# Altium PCB control.PcbDoc
Units mil, origin at the board's own origin, x right, y up, seen from the top; angles counter-clockwise.
Board outline 3935 x 3935 mil, 2 copper layers (Top Layer, Bottom Layer); 84 components, 50 nets, 326 pads, 61 vias.
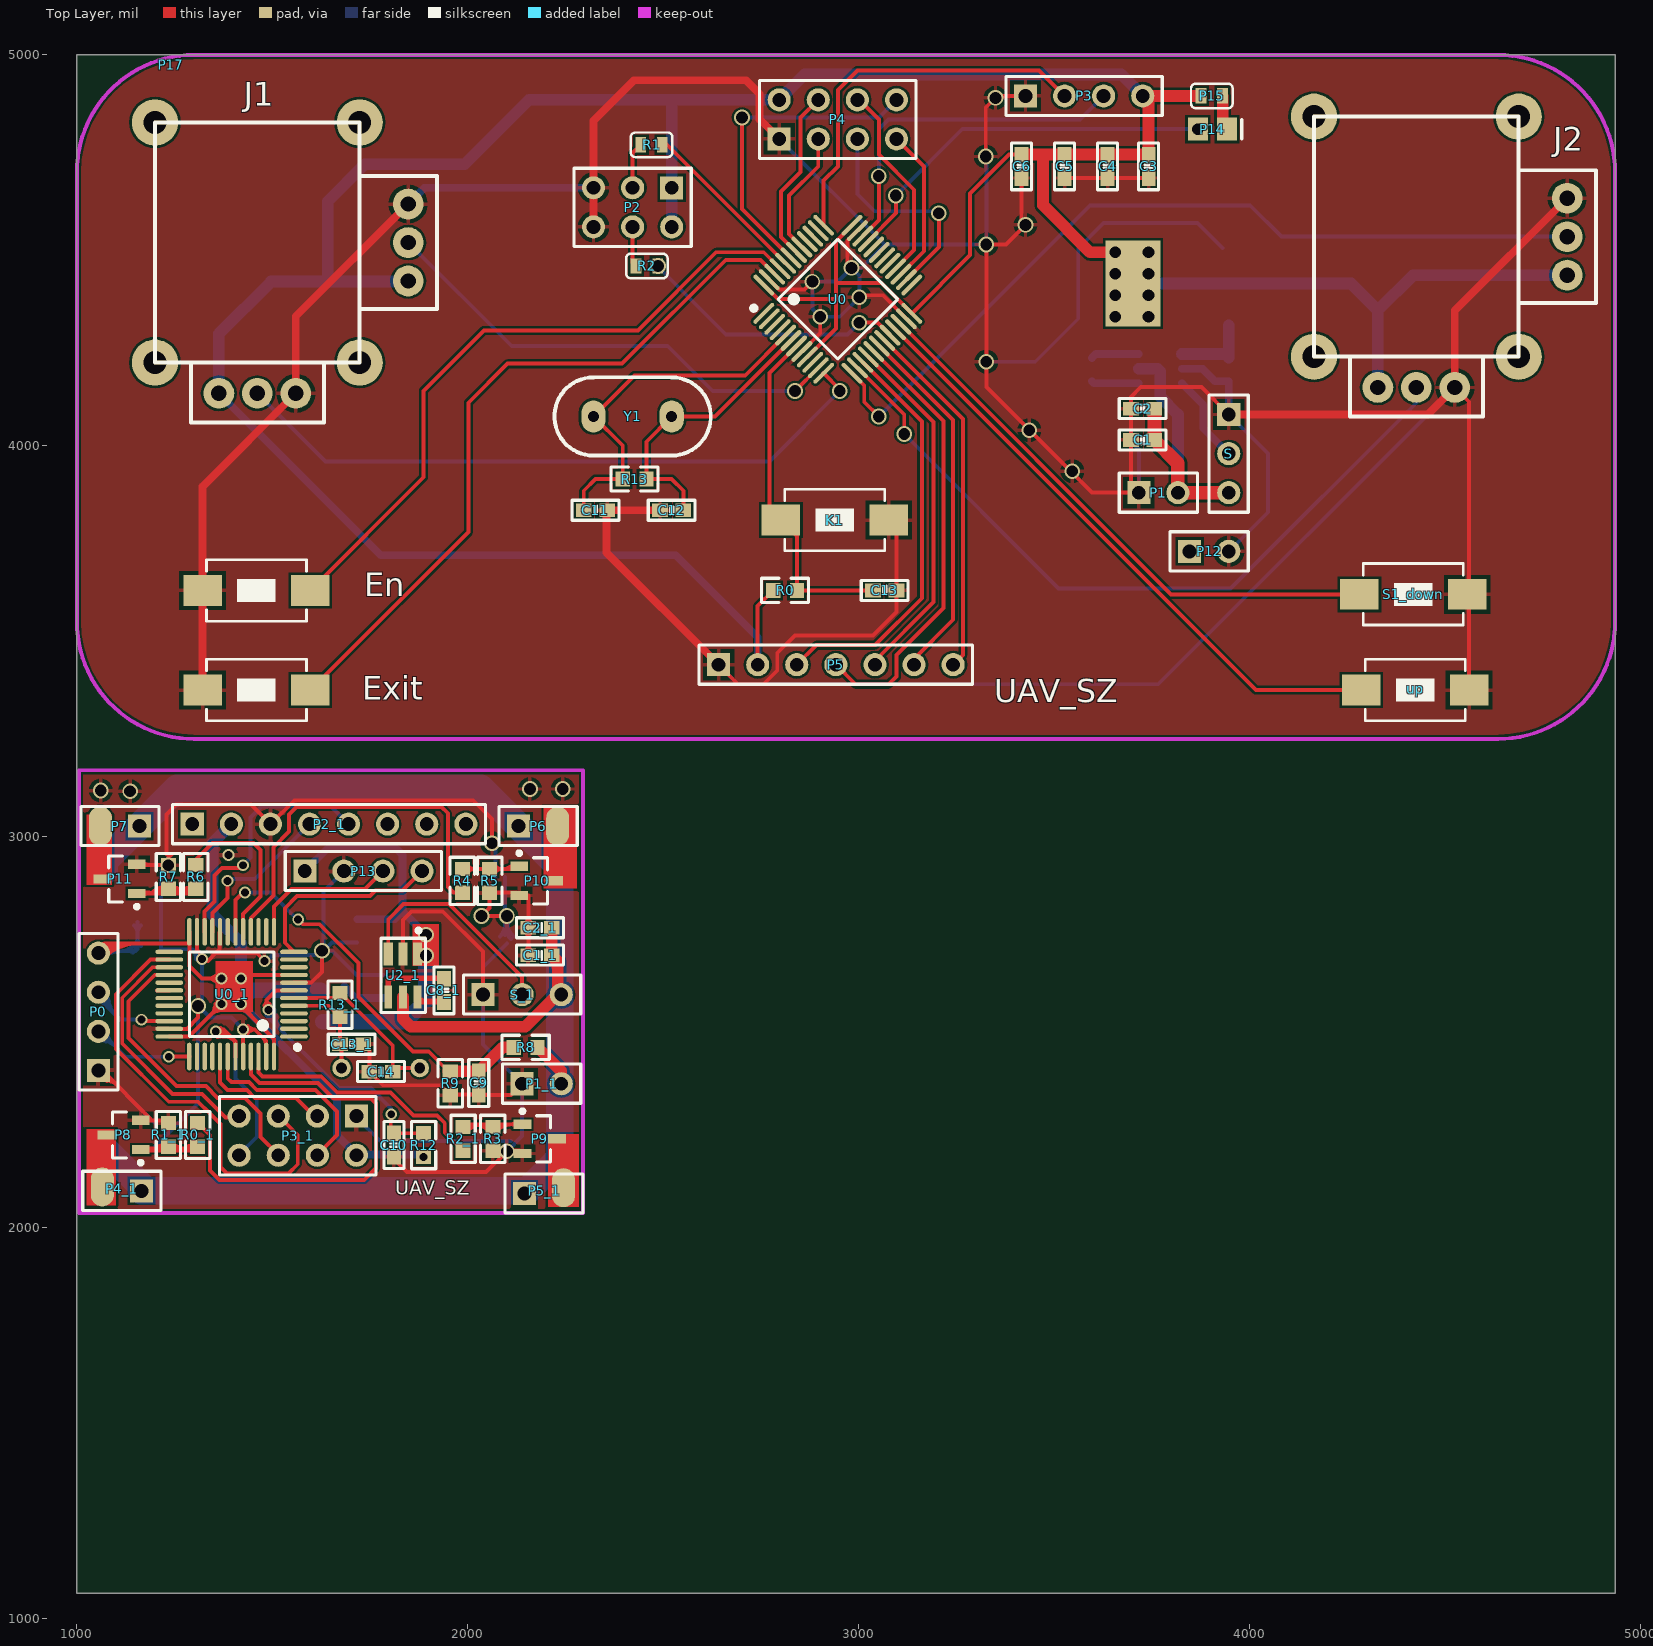
[diagram p0: Top Layer view]
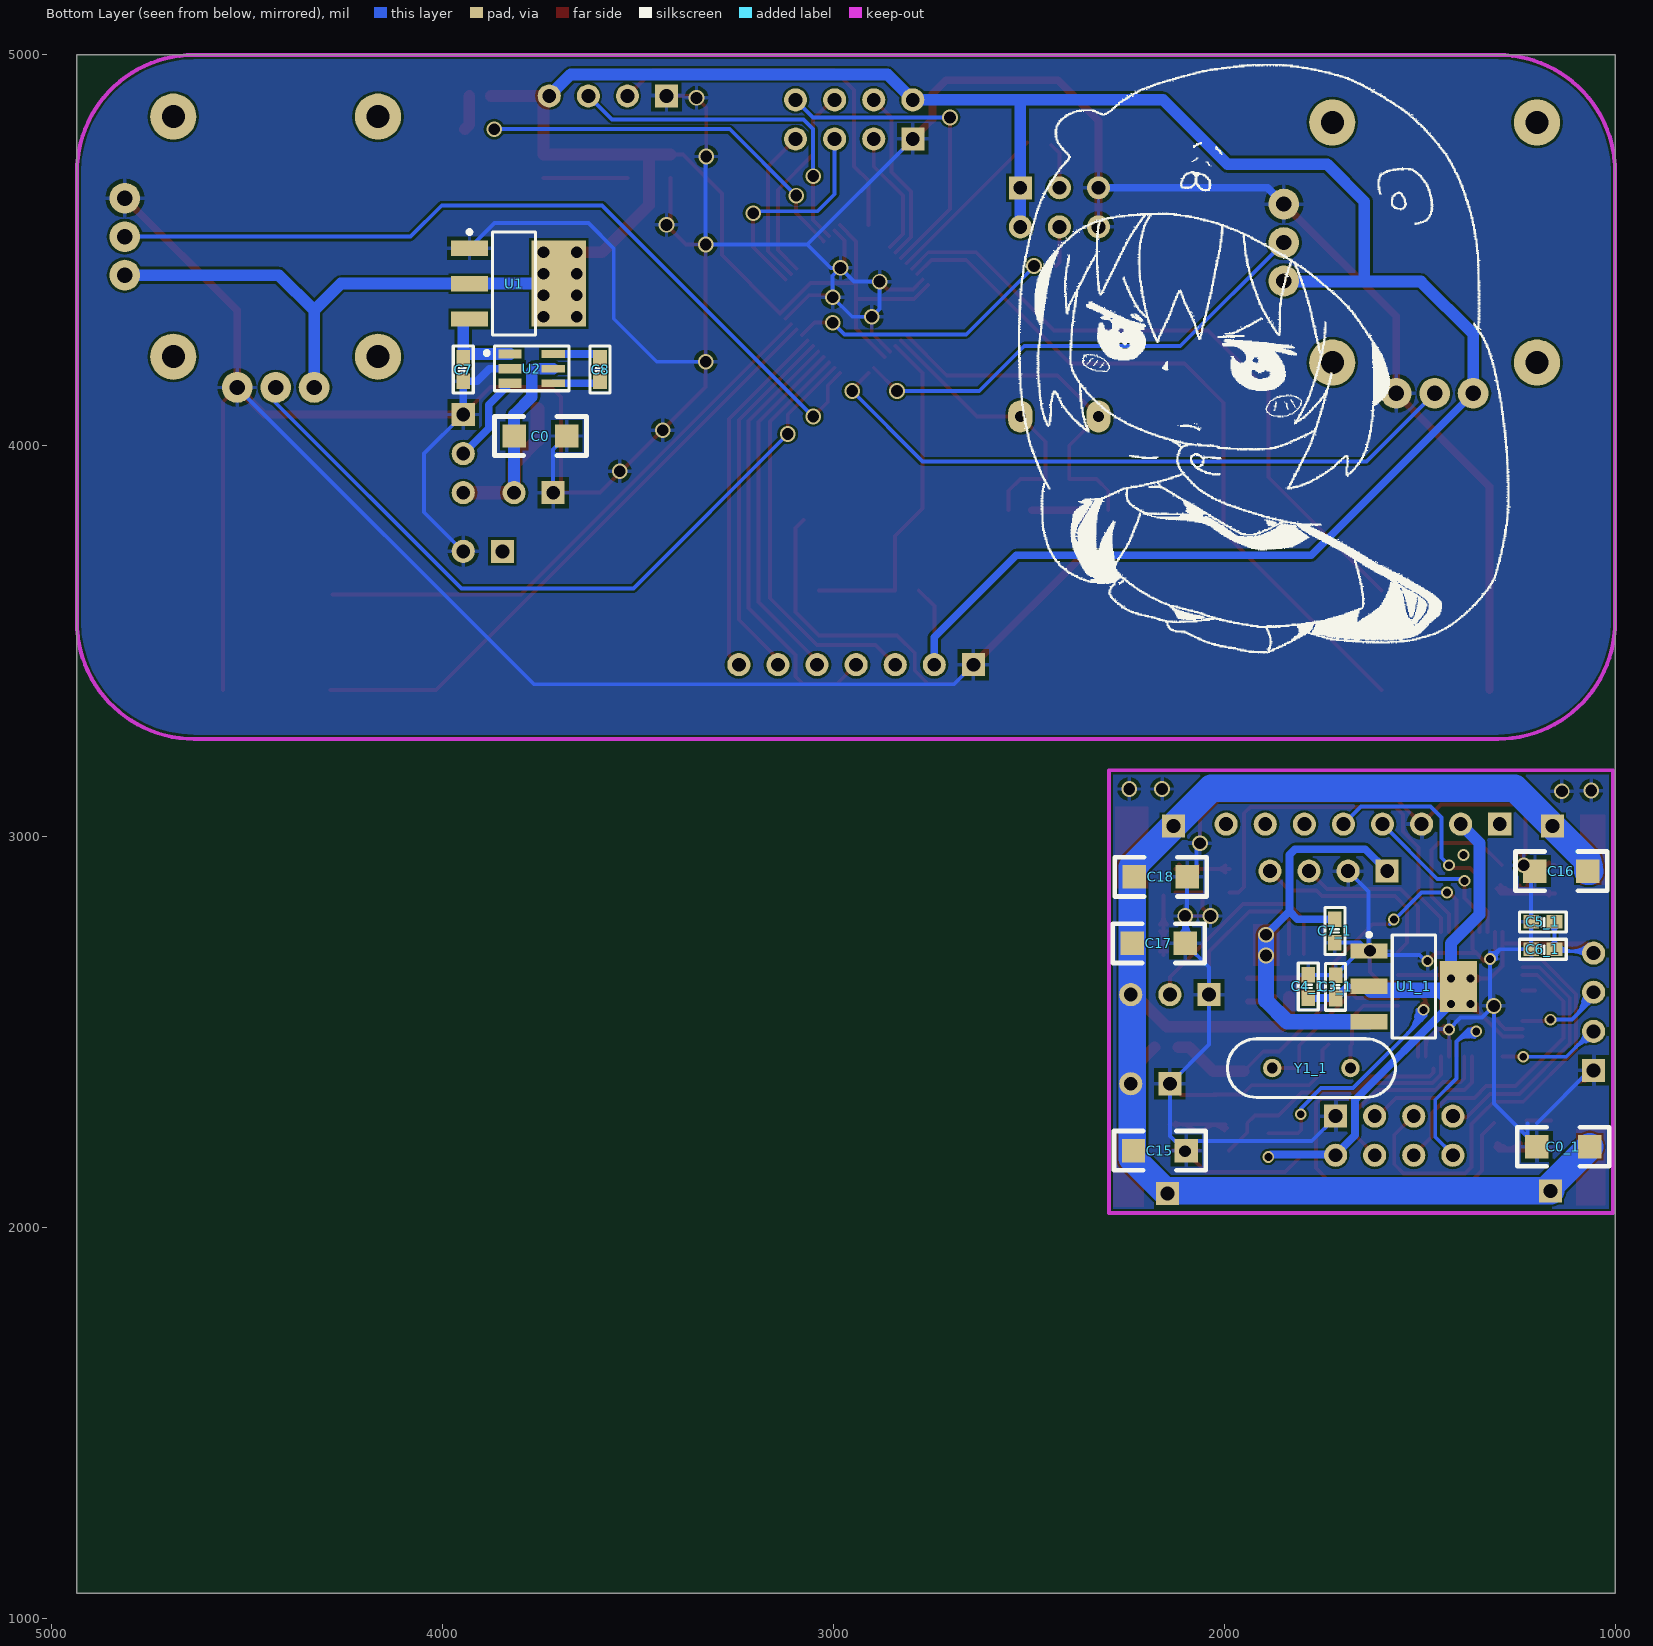
[diagram p1: Bottom Layer view, seen from below]

## Layer stack, top to bottom
Top Solder: solder mask 0.4, Solder Resist, Dk 3.5
Top Layer: signal copper 1.4
Dielectric 1: dielectric 12.6, FR-4, Dk 4.8
Bottom Layer: signal copper 1.4
Bottom Solder: solder mask 0.4, Solder Resist, Dk 3.5

## Board outline
1000,1065 1000,5000 4935,5000 4935,1065

## Design rules (kind name [scope] priority, off if disabled: settings)
Clearance [All] p1: gap=6
HoleToHoleClearance [All] p1: gap=0 allowstackedmicrovias=TRUE
MinimumSolderMaskSliver [All] p1: minsoldermaskwidth=0
PolygonConnect [All] p1: connectstyle=Relief reliefconductorwidth=10 reliefentries=4 polygonreliefangle="90 Angle" airgapwidth=10
RoutingVias [All] p1: holewidth=28 width=50 viastyle="Through Hole" minholewidth=28 minwidth=50 maxholewidth=28 maxwidth=50
ShortCircuit [All] p1: allowed=TRUE
SilkToBoardRegionClearance [All] p1 off:
SilkToSilkClearance [All] p1: silktosilkclearance=0
SilkToSolderMaskClearance [IsPad] p1: minsilkscreentomaskgap=0 clearancetoexposedcopper=TRUE
SolderMaskExpansion [All] p1: expansion=4
Width [All] p1: maxlimit=100 minlimit=10 preferedwidth=10
23 further rules are at their usual default settings.

## Classes and differential pairs
component class control: C0 C1 C2 C3 C4 C5 C6 C7 C8 C11 C12 C13 En exit J1 J2 K1 P1 P2 P3 P4 P5 R0 R1 R2 R13 S1_down U1 U2 up

## Components (designator, comment, footprint, x,y, rotation, side; value= is the part's Value field where it differs from the comment)
C0 "Cap Pol" 1206C 3751.62,4025 r180 bottom
C0_1 "Cap Pol" 1206C 1130,2207 r0 bottom (schematic designator C0)
C1 "104" C0603 3726.62,4015 r0 top
C1_1 "104" C0603 2185,2697 r0 top (schematic designator C1)
C2 "Cap" C0603 3726.62,4095 r180 top
C2_1 "Cap" C0603 2185,2767 r180 top (schematic designator C2)
C3 "Cap" C0603 3741.62,4715 r90 top
C3_1 "Cap" C0603 1715,2616 r270 bottom (schematic designator C3)
C4 "Cap" C0603 3636.62,4715 r90 top
C4_1 "Cap" C0603 1785,2617 r270 bottom (schematic designator C4)
C5 "Cap" C0603 3526.62,4715 r90 top
C5_1 "Cap" C0603 1185,2782 r180 bottom (schematic designator C5)
C6 "Cap" C0603 3416.62,4715 r90 top
C6_1 "Cap" C0603 1185,2712 r180 bottom (schematic designator C6)
C7 "Cap" C0603 3946.62,4195 r270 bottom
C7_1 "Cap" C0603 1717,2759 r270 bottom (schematic designator C7)
C8 "Cap" C0603 3596.62,4195 r270 bottom
C8_1 "Cap" C0603 1939,2607 r90 top (schematic designator C8)
C9 "Cap" C0603 2028,2370 r90 top
C10 "Cap" C0603 1811,2211 r90 top
C11 "20p" C0603 2326.62,3835 r180 top
C12 "20p" C0603 2521.62,3835 r0 top
C13 "Cap" C0603 3066.62,3630 r180 top
C13_1 "20p" C0603 1703,2469 r180 top (schematic designator C13)
C14 "20p" C0603 1778,2399 r0 top
C15 "Cap Pol" 1206C 2167,2197 r180 bottom
C16 "Cap Pol" 1206C 1135,2912 r0 bottom
C17 "Cap Pol" 1206C 2170,2727 r180 bottom
C18 "Cap Pol" 1206C 2165,2897 r180 bottom
En "SW-PB" SW_PB2_A1 1461.62,3630 r90 top (schematic designator S2_enter)
Exit "SW-PB" SW_PB2_A1 1461.62,3375 r90 top (schematic designator S3_exit)
J1 "JoyStick" JoyStick 1461.62,4520 r270 top
J2 "JoyStick" JoyStick 4426.62,4535 r270 top
K1 "re" SW_PB2_A1 2936.62,3810 r270 top
P0 "Header 4" HDR1X4 1055,2402 r90 top
P1 "POWER" HDR1X2#1 3716.62,3880 r0 top
P1_1 "POWER" HDR1X2#1 2139,2368 r0 top (schematic designator P1)
P2 "Header 3X2" HDR2X3 2521.62,4660 r180 top
P2_1 "GY-86" HDR1X8 1295,3032 r0 top (schematic designator P2)
P3 "Header 4" HDR1X4 3426.62,4895 r0 top
P3_1 "NRF24L01" HDR2X4 1715,2285 r180 top (schematic designator P3)
P4 "NRF24L01" HDR2X4 2796.62,4785 r0 top
P4_1 "Header 2" HDR1X2#2 1165,2094 r180 top (schematic designator P4)
P5 "Header 7" HDR1X7 2641.62,3440 r0 top
P5_1 "Header 2" HDR1X2#3 2145,2087 r0 top (schematic designator P5)
P6 "Header 2" HDR1X2#4 2130,3027 r0 top
P7 "Header 2" HDR1X2#4 1160,3027 r180 top
P8 "SI2302" SOT-23B_N 1119,2237 r180 top
P9 "SI2302" SOT-23B_N 2184,2227 r0 top
P10 "SI2302" SOT-23B_N 2176,2887 r0 top
P11 "SI2302" SOT-23B_N 1109,2892 r180 top
P12 "Comment" HDR1X2#1 3846.62,3730 r0 top
P13 "Comment" HDR1X4 1583,2912 r0 top
P14 "Comment" LED_0805 3905,4810 r0 top
P15 "Comment" 0603R 3905,4895 r180 top
P17 "Comment" xiaomai 1240,4975 r0 top
R0 "Res" 0603_R 2811.62,3630 r180 top
R0_1 "1k" 0603_R 1309,2237 r270 top (schematic designator R0)
R1 "100K" 0603R 2471.62,4770 r180 top
R1_1 "10K" 0603_R 1234,2237 r270 top (schematic designator R1)
R2 "100K" 0603R 2456.62,4460 r0 top
R2_1 "Res1" 0603_R 1988,2227 r90 top (schematic designator R2)
R3 "Res1" 0603_R 2064,2227 r90 top
R4 "Res1" 0603_R 1986,2887 r270 top
R5 "Res1" 0603_R 2056,2887 r90 top
R6 "Res1" 0603_R 1304,2897 r90 top
R7 "Res1" 0603_R 1234,2897 r270 top
R8 "Res1" 0603_R 2148,2461 r0 top
R9 "Res1" 0603_R 1955,2369 r90 top
R12 "Res" 0603_R 1887,2211 r270 top
R13 "Res2" 0603_R 2426.62,3915 r180 top
R13_1 "Res2" 0603_R 1673,2570 r270 top (schematic designator R13)
S "HEADER 3" HDR1X3 3946.62,4080 r270 top
S1_down "SW-PB" SW_PB2_A1 4416.62,3620 r270 top
S_1 "HEADER 3" HDR1X3 2039,2596 r0 top (schematic designator S)
U0 "Component_1" LQFP-48_7x7x05P 2946.62,4375 r315 top
U0_1 "Component_1" LQFP-48_7x7x05P 1395.83,2597 r90 top (schematic designator U0)
U1 "AMS1117" SOT223_N#1 3816.62,4415 r180 bottom
U1_1 "AMS1117" SOT223_N#2 1515,2617 r180 bottom (schematic designator U1)
U2 "LTC3200" SOT-23-6 3771.62,4197.22 r270 bottom
U2_1 "LTC3200" SOT-23-6 1834,2645 r180 top (schematic designator U2)
up "SW-PB" SW_PB2_A1 4421.62,3375 r270 top (schematic designator S0_up)
Y1 "8M" XTAL-RAD-0.2#1 2421.62,4075 r180 top
Y1_1 "8M" XTAL-RAD-0.2#2 1777,2408 r180 bottom (schematic designator Y1)

## Footprints (in the part's own frame and the unit in brackets; to place one, negate y for a bottom-side part, rotate by r counter-clockwise, add the part's x,y. Pads: shape width x height; smd on the part's side, far side on the other; paste and mask are expansions set on the pad)
0603_R [mm]
  rect 0.93x0.98 smd: 1(-0.77,0) 2(0.77,0)
  silkscreen extent -1.53,-0.79 1.54,0.79, body extent -0.85,-0.4 0.85,0.4, height 0.56
0603R [mm]
  rect 0.7x1 smd: 1(-0.66,0) 2(0.74,0)
  silkscreen extent -1.31,-0.8 1.39,0.8, body extent -0.76,-0.4 0.84,0.4, height 0.3
1206C [mil]
  rect 60x60 smd: 1(-65,0) 2(70,0)
  silkscreen extent -115,-50 120,50, body extent -63,-31 63,31, height 39
C0603 [mil]
  rect 40x35 smd: 1(-29.92,0)
  rect 40x35 smd mask+4: 2(29.92,0)
  silkscreen extent -60,-26 60,26
HDR1X2#1 [mm] "Connector; Header; 2 Position"
  rect 1.5x1.5 hole 0.9: 1(0,0)
  round 1.5 hole 0.9: 2(2.54,0)
  silkscreen extent -1.27,-1.27 3.81,1.27
HDR1X2#2 [mm] "Connector; Header; 2 Position"
  rect 1.5x1.5 hole 0.9: 1(0,0)
  oval 1.5x2.54 smd: 2(2.54,-0.254)
  silkscreen extent -1.27,-1.27 3.81,1.27
HDR1X2#3 [mm] "Connector; Header; 2 Position"
  rect 1.5x1.5 hole 0.9: 1(0,0)
  oval 1.5x2.54 smd: 2(2.54,0.381)
  silkscreen extent -1.27,-1.27 3.81,1.27
HDR1X2#4 [mm] "Connector; Header; 2 Position"
  rect 1.5x1.5 hole 0.9: 1(0,0)
  oval 1.5x2.54 smd: 2(2.54,0)
  silkscreen extent -1.27,-1.27 3.81,1.27
HDR1X3 [mm] "Connector; Header; 3 Position"
  rect 1.5x1.5 hole 0.9: 1(0,0)
  round 1.5 hole 0.9: 2(2.54,0) 3(5.08,0)
  silkscreen extent -1.27,-1.27 6.35,1.27
HDR1X4 [mm]
  rect 1.5x1.5 hole 0.9: 1(0,0)
  round 1.5 hole 0.9: 2(2.54,0) 3(5.08,0) 4(7.62,0)
  silkscreen extent -1.27,-1.27 8.89,1.27
HDR1X7 [mm] "Connector; Header; 7 Position"
  rect 1.5x1.5 hole 0.9: 1(0,0)
  round 1.5 hole 0.9: 2(2.54,0) 3(5.08,0) 4(7.62,0) 5(10.16,0) 6(12.7,0) 7(15.24,0)
  silkscreen extent -1.27,-1.27 16.51,1.27
HDR1X8 [mm] "Connector; Header; 8 Position"
  rect 1.5x1.5 hole 0.9: 1(0,0)
  round 1.5 hole 0.9: 2(2.54,0) 3(5.08,0) 4(7.62,0) 5(10.16,0) 6(12.7,0) 7(15.24,0) 8(17.78,0)
  silkscreen extent -1.27,-1.27 19.05,1.27
HDR2X3 [mm] "Connector; Header; 3x2 Position"
  rect 1.5x1.5 hole 0.9: 1(0,0)
  round 1.5 hole 0.9: 2(0,2.54) 3(2.54,0) 4(2.54,2.54) 5(5.08,0) 6(5.08,2.54)
  silkscreen extent -1.27,-1.27 6.35,3.81
HDR2X4 [mm] "Connector; Header; 4x2 Position"
  rect 1.5x1.5 hole 0.9: 1(0,0)
  round 1.5 hole 0.9: 2(0,2.54) 3(2.54,0) 4(2.54,2.54) 5(5.08,0) 6(5.08,2.54) 7(7.62,0) 8(7.62,2.54)
  silkscreen extent -1.27,-1.27 8.89,3.81
JoyStick [mm] "ģ?"
  round 2 hole 1: 1(-2.5,9.8) 2(0,9.8) 3(2.5,9.8) 4(9.8,2.5) 5(9.8,0) 6(9.8,-2.5)
  round 3 hole 1.5: 11(-7.8,6.65) 12(7.8,6.65) 13(-7.8,-6.65) 14(7.8,-6.65)
  silkscreen extent -7.8,-6.65 11.68,11.68
LED_0805 [mm] "贴片二极管"
  rect 1.3x1.5 smd: 1(-0.95,0) 2(0.95,0)
  silkscreen extent 1.91,-0.64 1.91,0.64
LQFP-48_7x7x05P [mm]
  oval 0.28x1.8 smd mask+0.051: 1(-2.75,-4.05) 2(-2.25,-4.05) 3(-1.75,-4.05) 4(-1.25,-4.05) 5(-0.75,-4.05) 6(-0.25,-4.05) 7(0.25,-4.05) 8(0.75,-4.05) 9(1.25,-4.05) 10(1.75,-4.05) 11(2.25,-4.05) 12(2.75,-4.05) 25(2.75,4.05) 26(2.25,4.05) 27(1.75,4.05) 28(1.25,4.05) 29(0.75,4.05) 30(0.25,4.05) 31(-0.25,4.05) 32(-0.75,4.05) 33(-1.25,4.05) 34(-1.75,4.05) 35(-2.25,4.05) 36(-2.75,4.05)
  oval 1.8x0.28 smd mask+0.051: 13(4.05,-2.75) 14(4.05,-2.25) 15(4.05,-1.75) 16(4.05,-1.25) 17(4.05,-0.75) 18(4.05,-0.25) 19(4.05,0.25) 20(4.05,0.75) 21(4.05,1.25) 22(4.05,1.75) 23(4.05,2.25) 24(4.05,2.75) 37(-4.05,2.75) 38(-4.05,2.25) 39(-4.05,1.75) 40(-4.05,1.25) 41(-4.05,0.75) 42(-4.05,0.25) 43(-4.05,-0.25) 44(-4.05,-0.75) 45(-4.05,-1.25) 46(-4.05,-1.75) 47(-4.05,-2.25) 48(-4.05,-2.75)
  silkscreen extent -3.6,-4.42 2.75,2.75
SOT223_N#1 [mm] "SOT223, 4-Leads, Body 6.5x3.5mm, Pitch 2.3mm, Lead Span 7mm, IPC Medium Density"
  rect 2.4x1 smd: 1(-2.9,2.3) 2(-2.9,0) 3(-2.9,-2.3)
  rect 3.556x5.588 smd: 4(2.9,0)
  silkscreen extent -3.03,-3.35 1.4,3.47, body extent -1.85,-3.35 1.85,3.35, height 1.7
SOT223_N#2 [mm] "SOT223, 4-Leads, Body 6.5x3.5mm, Pitch 2.3mm, Lead Span 7mm, IPC Medium Density"
  rect 2.4x1 smd: 1(-2.9,2.3) 2(-2.9,0) 3(-2.9,-2.3)
  rect 2.4x3.3 smd: 4(2.9,0)
  silkscreen extent -3.03,-3.35 1.4,3.47, body extent -1.85,-3.35 1.85,3.35, height 1.7
SOT-23-6 [mm]
  rect 0.6x1.5 smd: 1(-0.95,-1.4) 2(0,-1.4)
  rect 0.63x1.5 smd: 3(0.95,-1.4)
  rect 0.5x1.5 smd: 4(0.95,1.4) 5(0,1.4) 6(-0.95,1.4)
  silkscreen extent -1.47,-3.05 1.43,2.41
SOT-23B_N [mm] "SOT23, 3-Leads, Body 2.9x1.3mm, Pitch 0.95mm, Lead Span 2.4mm, IPC Medium Density"
  rect 1.15x0.6 smd: 1(-1.125,0.95) 2(-1.125,-0.95) 3(1.125,0)
  silkscreen extent -1.25,-1.5 0.7,1.92, body extent -0.7,-1.5 0.7,1.5, height 1.14
SW_PB2_A1 [mm]
  rect 2x2.5 smd: 1(0,3.556) 2(0,-3.444)
  silkscreen extent -2,-3.19 2,3.31, body extent -2.03,-3.17 2.03,3.3, height 1.2
xiaomai [mil]
XTAL-RAD-0.2#1 [mil] "Radial Cap, Thru-Hole; 2 Leads; 0.2 in Pin Spacing"
  oval 62x82 hole 28: 1(-100,0) 2(100,0)
  silkscreen extent -200,-100 200,100
XTAL-RAD-0.2#2 [mil] "Radial Cap, Thru-Hole; 2 Leads; 0.2 in Pin Spacing"
  round 47.24 hole 27.56: 1(-100,0) 2(100,0)
  silkscreen extent -215,-75 215,75, body extent -210,-81 210,81, height 127

## Part data
C0 C0_1 C15 C16 C17 C18: "极性电解电容"
C1 C1_1 C11 C12 C13_1 C14: library part CAP, "Capacitor"
C2 C2_1 C10 C13: "贴片电容"
C3 C3_1 C4 C4_1 C5 C5_1 C6 C6_1 C7 C7_1 C9: "无极性电容"
C8 C8_1: "Capacitor"
En Exit S1_down up: "微动开关"
J1 J2: "模拟摇杆"
K1: library part key
P0 P3: "Header, 4-Pin"
P1 P1_1: library part "Header 2", "Header, 2-Pin"
P2: "Header, 3-Pin, Dual row"
P2_1: library part "Header 8", "Header, 8-Pin"
P3_1 P4: library part "Header 4X2", "Header, 4-Pin, Dual row"
P4_1 P5_1 P6 P7: "Header, 2-Pin"
P5: "Header, 7-Pin"
R0 R2_1 R3 R4 R5 R6 R7 R8 R9 R12: "贴片电阻"
R0_1 R1_1: library part Res1, "贴片电阻"
R1 R2: library part Res, "贴片电阻"
R13 R13_1: "Resistor"
Y1 Y1_1: library part XTAL

## Free pads (board coordinates)
  rect 140x220 smd: 0(3701.62,4415)

## Via types
v1: diameter 40, hole 30, Top Layer to Bottom Layer, 43 vias
v2: diameter 30, hole 20, Top Layer to Bottom Layer, 18 vias

## Nets (pads, with @x,y where several pads share a name; then routed paths per layer and width w, separated by ;. In a path a pad name is that pad's centre, name@x,y a point inside that pad or via, vN(x,y) a via of type N, cw(c..) or ccw(c..) an arc to the next point about the centre after c; other vN are vias at no path point)
3V3: C3.2 C4.2 C5.2 C6.2 J1.3 J1.6 J2.3 J2.6 P2.1 P2.2 P3.4 P4.2 P5.2 P15.2 pad.0 R0.2 U0.9 U0.24 U0.36 U0.48 U1.2 U1.4 | length 9103.4
  Top Layer w10: P5.2 2741.62,3590.32 R0.2 ; U0.48 2793.51,4375 2941.62,4375 ; U0.9 2941.62,4300.4 2941.62,4416.89 ; U0.36 2941.62,4523.11 2941.62,4416.89 ; C6.2 3384.92,4744.92 3285,4645 3285,4487.88 U0.24 3057.85,4416.89 2941.62,4416.89 ; pad.0@3647.81,4338.81 v1(3656.62,4330)
  Top Layer w30: C6.2 3471.62,4744.92 3471.62,4615 3591.62,4495 v1(3656.62,4495) ; 3476.62,4744.92 C5.2 C4.2 C3.2 3741.62,4880 P3.4 P15.2
  Bottom Layer w20: J1.6 1777.37,3720 2531.62,3720 2741.62,3510 P5.2
  Bottom Layer w30: J1.6 1363.2,4286.57 1496.62,4420 1845.87,4420 J1.3 ; 1641.62,4420 1641.62,4625 1736.62,4720 1991.62,4720 2156.62,4885 P4.2 2861.62,4950 3671.62,4950 P3.4 ; P2.2 P2.1 2521.62,4883.38 ; U1.4 U1.2 4259.77,4415 4328.2,4346.57 ; J2.6 4328.2,4346.57 ; J2.3 4418.2,4436.57 4328.2,4346.57
  other v1: 3741.62,4330 3656.62,4385 3741.62,4385 3656.62,4440 3741.62,4440 3741.62,4495
5V: C7.1 U1.3 U2.1 | length 193.9
  Bottom Layer w30: U2.1 C7.1@3936.92,4234.63 ; C7.1 U1.3@3946.62,4308.62
BOOT0: R1.1 U0.44 | length 437.3
  Top Layer w10: R1.1@2503.74,4776.12 U0.44
BOOT1: R2.2 U0.20 | length 692.2
  Top Layer w10: v1(3001.62,4315) 3048.38,4315 U0.20
  Bottom Layer w10: v1@2485.81,4459.19 2660,4285 2971.62,4285 v1(3001.62,4315)
  other v1: 2486.62,4460
GND: C0.2 C1.1 C2.2 C3.1 C4.1 C5.1 C6.1 C7.2 C11.1 C12.1 C13.1 En.1 Exit.1 J1.1 J1.4 J2.1 J2.4 K1.1 P1.1 P2.5 P2.6 P3.1 P4.1 P5.1 P12.2 S1_down.1 S.1 U0.8 U0.23 U0.35 U0.47 U1.1 U2.2 up.1 | length 14218
  Top Layer w10: P5.1 2691.62,3390 2756.62,3390 2791.62,3425 2791.62,3470 2836.62,3515 3036.62,3515 3096.54,3574.92 C13.1 3096.54,3790.08 K1.1 ; U0.47 2796.35,4400 2861.62,4400 v1(2881.62,4420) ; U0.8 2901.62,4288.24 v1(2901.62,4330) ; v1@2971.62,4455 2971.62,4525.27 U0.35 ; v1@3001.62,4385 3061.9,4385 U0.23 ; v1(3325,4740) 3325,4865 v1(3350,4890) ; v1@3355,4895 P3.1 ; v1@3416.62,4575 C6.1 ; v1(3426.62,4565) 3376.62,4515 v1(3326.62,4515) v1(3326.62,4215) 3326.62,4150 3596.62,3880 P1.1 P1.1@3696.7,3899.92 ; C5.1 C4.1 C3.1 ; P1.1@3696.7,3880 C1.1 C2.2 3696.7,4125.08 3721.62,4150 3876.62,4150 S.1 ; J2.4 4561.62,4112.6 up.1
  Top Layer w20: Exit.1 En.1 1321.62,3895.75 J1.4 1560.05,4331.02 J1.1 ; P2.6 P2.5 2321.62,4831.62 2425,4935 2711.62,4935 2746.62,4900 2746.62,4835 P4.1 ; C11.1@2355,3835 2355,3726.62 P5.1 ; C11.1 C12.1 ; S.1 4455.87,4080 J2.4 4525.05,4346.02 J2.1
  Bottom Layer w10: P5.1 2691.62,3390 3765.87,3390 J2.4 ; P4.1 3066.62,4515 ; v1(3325,4740) 3325,4741.62 3326.62,4740 v1(3326.62,4515) 3066.62,4515 ; v1(3326.62,4215) 3451.62,4215 3561.62,4325 3561.62,4505 3626.62,4570 3866.35,4570 U1.1 ; C0.2 3716.62,3990 P1.1 ; P12.2 4046.62,3830 4046.62,3980 S.1 ; v1(2981.62,4455) 3006.62,4455 3066.62,4515 ; v1(2981.62,4455) 3001.62,4435 v1(3001.62,4380) 2951.62,4330 v1(2901.62,4330) 2881.62,4350 v1(2881.62,4420) 2946.62,4420 v1(2981.62,4455)
  Bottom Layer w20: J1.1 1889.02,4660 P2.5 ; U2.2 3879.4,4197.22 3911.54,4165.08 C7.2 S.1
  other v1: 3546.62,3935 3436.62,4040
NetC8_1: C8.1 U2.6 | length 123.9
  Bottom Layer w20: C8.1 3606.33,4234.63 U2.6
NetC8_2: C8.2 U2.4 | length 122.1
  Bottom Layer w20: C8.2 3601.88,4159.82 U2.4
NetP2_3: P2.3 R1.2 | length 118.6
  Top Layer w10: P2.3 2421.62,4749.12 R1.2
NetP2_4: P2.4 R2.1 | length 103.7
  Top Layer w10: P2.4 2421.62,4469 R2.1
NetS_2: S.2 U2.3 | length 229.5
  Bottom Layer w20: U2.3 3881.62,4104.94 3881.62,4045 S.2
NewNet: P14.2 P15.1 | length 89.7
  Top Layer w30: P15.1 3931,4821.4 P14.2
OSCIN: C11.2 R13.2 U0.5 Y1.2 | length 930.6
  Top Layer w10: C11.2 2296.7,3885.08 2326.62,3915 R13.2 2396.31,4000.32 Y1.2 2426.62,4180 2709.86,4180 U0.5
OSCOUT: C12.2 R13.1 U0.6 Y1.1 | length 729.6
  Top Layer w10: C12.2 2551.54,3885.08 2521.62,3915 R13.1 2456.94,4010.31 Y1.1 2632.7,4075 U0.6
PA0: U0.10
PA1: J1.2 U0.11 | length 1231.2
  Top Layer w10: v1(2836.9,4140) U0.11
  Bottom Layer w10: J1.2 2112.45,4255 2511.62,4255 2626.62,4140 v1(2836.9,4140)
PA2: J1.5 U0.12 | length 1699.5
  Top Layer w10: U0.12 2951.62,4144.51 v1(2951.62,4140)
  Bottom Layer w10: J1.5 1635.79,3960 2771.62,3960 v1(2951.62,4140)
PA3: J2.2 U0.13 | length 2156.8
  Top Layer w10: U0.13 3014.12,4154.39 3014.12,4112.5 v1(3051.62,4075)
  Bottom Layer w10: v1(3051.62,4075) 3591.62,4615 4001.62,4615 4081.62,4535 J2.2
PA4: J2.5 U0.14 | length 1928.8
  Top Layer w10: U0.14 3116.62,4079.73 v1(3116.62,4030)
  Bottom Layer w10: v1(3116.62,4030) 3511.62,3635 3951.62,3635 4426.62,4110 J2.5
PA5: P5.3 U0.15 | length 1056.5
  Top Layer w10: P5.3 2891.62,3490 3041.62,3490 3161.62,3610 3161.62,4062.56 U0.15
PA6: P5.5 U0.16 | length 918.8
  Top Layer w10: U0.16 3191.62,4060.4 3191.62,3600 3041.62,3450 P5.5
PA7: P5.4 U0.17 | length 1138.9
  Top Layer w10: P5.4 2991.62,3390 3076.62,3390 3096.62,3410 3096.62,3465 3216.62,3585 3216.62,4063.24 U0.17
PA8: U0.29
PA9: U0.30
PA10: U0.31
PA11: U0.32
PA12: P14.1 U0.33 | length 979.6
  Top Layer w10: U0.33 3024.57,4524.57 3095,4595 v1@3095,4630
  Bottom Layer w10: v1(3095,4640) 3265,4810 v1(3867.6,4810)
PA15: U0.38
PB0: P5.6 U0.18 | length 935.1
  Top Layer w10: U0.18 3241.62,4066.08 3241.62,3555 3141.62,3455 P5.6
PB1: P5.7 U0.19 | length 922.5
  Top Layer w10: U0.19 3266.62,4068.92 3266.62,3465 P5.7
PB3: U0.39
PB4: U0.40
PB5: P4.3 U0.41 | length 321.2
  Top Layer w10: U0.41 2821.62,4541.76 2821.62,4640 2896.62,4715 P4.3
PB6: P4.4 U0.42 | length 445.9
  Top Layer w10: U0.42 2801.62,4533.92 2801.62,4650 2851.62,4700 2851.62,4840 P4.4
PB7: P4.8 U0.43 | length 824.8
  Top Layer w10: v1(2701.62,4840) 2701.62,4606.08 U0.43
  Bottom Layer w10: v1(2701.62,4840) 3051.62,4840 P4.8
PB8: En.2 U0.45 | length 1706.8
  Top Layer w10: En.2 1886.62,3919.41 1886.62,4140 2041.62,4295 2435,4295 2635,4495 2757.02,4495 U0.45
PB9: Exit.2 U0.46 | length 1852.1
  Top Layer w10: Exit.2 2001.62,3779.41 2001.62,4110 2101.62,4210 2395,4210 2660,4475 2749.18,4475 U0.46
PB10: U0.21 up.2 | length 1573.8
  Top Layer w10: U0.21 4016.22,3375 up.2
PB11: S1_down.2 U0.22 | length 1459.2
  Top Layer w10: U0.22 3799.06,3620 S1_down.2
PB12: U0.25
PB13: P4.5 U0.26 | length 572.2
  Top Layer w10: U0.26 3205,4508.1 v1(3205,4595)
  Bottom Layer w10: P4.5 2996.62,4643.38 3040,4600 v1@3205,4600
PB14: P4.7 U0.27 | length 399.2
  Top Layer w10: P4.7 3166.62,4715 3166.62,4497.56 U0.27
PB15: P4.6 U0.28 | length 514.7
  Top Layer w10: P4.6 3001.62,4885 3051.62,4835 3051.62,4745 3141.62,4655 3141.62,4500.4 U0.28
PC13: U0.2
PC14: U0.3
PC15: U0.4
RESET: C13.2 K1.2 R0.1 U0.7 | length 877.9
  Top Layer w10: U0.7 2771.62,4186.08 2771.62,3839.41 K1.2 2841.94,3769.09 R0.1 C13.2
SWCLK: P3.2 U0.37 | length 988.3
  Top Layer w10: U0.37 2910.43,4678.81 2946.62,4715 2946.62,4910 2996.62,4960 3461.62,4960 P3.2
SWIO: P3.3 U0.34 | length 900.7
  Top Layer w10: U0.34 3051.62,4577.44 v1(3051.62,4690)
  Bottom Layer w10: v1(3051.62,4690) 3051.62,4810 3076.62,4835 3566.62,4835 P3.3
VBAT: U0.1
VCC: C0.1 C1.2 C2.1 P1.2 S.3 U2.5 | length 755.5
  Top Layer w35: C1.2 C2.1 ; C1.2@3757.37,4014.17 3816.62,3954.92 P1.2 S.3
  Bottom Layer w30: U2.5 3764.4,4197.22 3771.62,4190 3771.62,4125 3816.62,4080 C0.1 P1.2
pads on no net: C0_1.1 C0_1.2 C1_1.1 C1_1.2 C2_1.1 C2_1.2 C3_1.1 C3_1.2 C4_1.1 C4_1.2 C5_1.1 C5_1.2 C6_1.1 C6_1.2 C7_1.1 C7_1.2 C8_1.1 C8_1.2 C9.1 C9.2 C10.1 C10.2 C13_1.1 C13_1.2 C14.1 C14.2 C15.1 C15.2 C16.1 C16.2 C17.1 C17.2 C18.1 C18.2 J1.11 J1.12 J1.13 J1.14 J2.11 J2.12 J2.13 J2.14 P0.1 P0.2 P0.3 P0.4 P1_1.1 P1_1.2 P2_1.1 P2_1.2 P2_1.3 P2_1.4 P2_1.5 P2_1.6 P2_1.7 P2_1.8 P3_1.1 P3_1.2 P3_1.3 P3_1.4 P3_1.5 P3_1.6 P3_1.7 P3_1.8 P4_1.1 P4_1.2 P5_1.1 P5_1.2 P6.1 P6.2 P7.1 P7.2 P8.1 P8.2 P8.3 P9.1 P9.2 P9.3 P10.1 P10.2 P10.3 P11.1 P11.2 P11.3 P12.1 P13.1 P13.2 P13.3 P13.4 R0_1.1 R0_1.2 R1_1.1 R1_1.2 R2_1.1 R2_1.2 R3.1 R3.2 R4.1 R4.2 R5.1 R5.2 R6.1 R6.2 R7.1 R7.2 R8.1 R8.2 R9.1 R9.2 R12.1 R12.2 R13_1.1 R13_1.2 S_1.1 S_1.2 S_1.3 U0_1.1 U0_1.2 U0_1.3 U0_1.4 U0_1.5 U0_1.6 U0_1.7 U0_1.8 U0_1.9 U0_1.10 U0_1.11 U0_1.12 U0_1.13 U0_1.14 U0_1.15 U0_1.16 U0_1.17 U0_1.18 U0_1.19 U0_1.20 U0_1.21 U0_1.22 U0_1.23 U0_1.24 U0_1.25 U0_1.26 U0_1.27 U0_1.28 U0_1.29 U0_1.30 U0_1.31 U0_1.32 U0_1.33 U0_1.34 U0_1.35 U0_1.36 U0_1.37 U0_1.38 U0_1.39 U0_1.40 U0_1.41 U0_1.42 U0_1.43 U0_1.44 U0_1.45 U0_1.46 U0_1.47 U0_1.48 U1_1.1 U1_1.2 U1_1.3 U1_1.4 U2_1.1 U2_1.2 U2_1.3 U2_1.4 U2_1.5 U2_1.6 Y1_1.1 Y1_1.2
copper on no net: | length 35267.3
  Top Layer w10: 1044.82,2405.23 ccw(c1088.99,2420.36) 1076.91,2375.26 ; 1050,2407 1060,2407 1192.6,2274.4 ; 1050,2707 1070,2727 1287.56,2727 ; 1054.28,2408.47 ccw(c1110.39,2427.7) 1095.04,2370.4 ; 1054.48,2407.66 ccw(c1080.46,2411.5) 1073.67,2386.13 ; 1060.49,2717.05 ccw(c1077.07,2732.94) 1088.55,2713.05 ; 1066.47,2725.18 ccw(c1077.96,2737.87) 1086.52,2723.04 ccw(c1098.8,2701.78) 1074.39,2704.39 ; 1067.71,2723.97 ccw(c1086.54,2742.02) 1099.59,2719.43 ; 1153.29,2854.6 1291.91,2854.6 ; 1155.38,2927.31 1234,2927.31 1234,2947 1243,2956 ; 1163.29,2274.4 1226.91,2274.4 ; v2@1165,2528.1 1236.38,2528.1 ; 1197.13,2860.81 cw(c1208.08,2841.86) 1223.58,2857.3 ; 1204.84,2606.84 1236.38,2606.84 ; 1208.39,2867.31 cw(c1217.61,2851.35) 1230.67,2864.35 ; 1210.2,2857.2 cw(c1216.77,2845.82) 1224.84,2856.19 ; 1210.28,2857.24 ccw(c1199.67,2875.62) 1220.16,2870.13 ; 1221.76,2269.24 1223.69,2267.31 ; 1229,2956 1229,3057 1254,3082 1445,3082 1495,3032 1556,3093 2014,3093 2062,3045 v1(2062,2983) ; v2@1235.55,2437.55 1287.56,2437.55 ; 1236.38,2488.73 1286.73,2488.73 v2(1370,2572) ; 1236.38,2508.42 1281.42,2508.42 1310,2537 v1(1310,2567) ; 1236.38,2646.21 1199.21,2646.21 1132,2579 1132,2485 1255,2362 1330,2362 1360,2332 1430,2332 1470,2292 1470,2232 1515,2187 ; 1236.38,2665.9 1193.9,2665.9 1116,2588 1116,2471 1245,2342 1320,2342 1380,2282 1415,2282 ; 1236.38,2685.58 1188.58,2685.58 1100,2597 1100,2457 1235,2322 1310,2322 1340,2292 1367,2265 1367,2155 1384,2138 1541,2138 1565,2162 1565,2237 1515,2287 ; 1237.45,2864.48 cw(c1249.18,2853.99) 1257.78,2867.18 ; 1243.77,2856.69 cw(c1249.89,2849.73) 1254.94,2857.5 cw(c1263.19,2870.16) 1248.19,2868.31 ; 1244.9,2857.82 cw(c1257.97,2846.13) 1267.54,2860.82 ; 1267.13,2860.81 cw(c1278.07,2841.86) 1293.58,2857.3 ; 1278.39,2867.31 cw(c1287.61,2851.35) 1300.67,2864.35 ; 1280.2,2857.2 cw(c1286.77,2845.82) 1294.84,2856.19 ; 1280.28,2857.24 ccw(c1269.67,2875.62) 1290.16,2870.13 ; 1287.56,2756.45 1287.56,2727 ; 1290,2927.32 1346.68,2984 1452,2984 1470,2966 1470,2847 1425.35,2802.35 1425.35,2756.45 ; 1304,2866.68 1291.91,2854.6 ; 1307.24,2756.45 1307.24,2709.76 1335,2682 1355,2702 ; 1310,2268 1341,2237 1341,2146 1365,2122 1735,2122 1765,2152 1765,2317 1752,2330 1659.37,2330 1657.37,2332 1655,2332 1617,2370 1467,2370 1445.04,2391.96 1445.04,2437.55 ; 1326.93,2756.45 1326.93,2808.93 1352,2834 1352,2901 1371,2920 1418,2920 v2(1425,2927) ; 1346.61,2756.45 1346.61,2804.61 1385,2843 v2(1385,2887) ; v2@1351.61,2498.32 ccw(c1376.94,2525.84) 1378.49,2488.48 ; 1352.03,2560.92 cw(c1373.44,2555.18) v2@1369,2576.9 ; 1358.92,2554.03 ccw(c1353.18,2575.44) v2@1374.9,2571 ; v2@1365,2507 1375,2507 ; 1366.04,2491.84 cw(c1380.55,2478.49) 1379.73,2498.19 ; 1366.3,2437.55 1366.3,2370.7 1385,2352 1435,2352 1455,2332 1560,2332 1615,2277 ; 1366.3,2756.45 1365,2755.15 1365,2712 1355,2702 ; v2(1370,2637) 1320,2637 1287.56,2669.44 1287.56,2727 ; 1385.98,2437.55 1385.98,2381.02 1395,2372 1440,2372 1460,2352 1610,2352 1665,2297 1665,2237 1615,2187 ; 1405.67,2437.55 1405.67,2476.33 ; 1405.67,2756.45 1405.67,2837.67 v2@1420,2852 ; v2(1420,2572) 1415,2572 1504.09,2482.91 1504.09,2437.55 ; v2@1421.52,2576.76 cw(c1413.73,2552.34) 1438.49,2558.98 ; v2(1425,2507) 1455,2507 ; 1425.35,2437.55 v2@1425.35,2506.65 ; v2@1429.21,2646.21 1555.28,2646.21 ; 1445.04,2756.45 1445.04,2792.04 1503,2850 1503,2973 1543,3013 1543,3057 1562,3076 1933,3076 1949,3060 1949,2871 1963.32,2856.68 1986,2856.68 ; 1465,2407 1465,2397 1475,2387 1625,2387 1666,2346 1802,2346 1861,2287 1921,2287 1941,2267 1941,2243.69 1988,2196.69 ; v2(1480,2682) 1460,2702 1355,2702 ; 1484.41,2437.55 1484.41,2477.59 1455,2507 ; v2@1485,2552 1485,2582 ; 1504.09,2756.45 1504.09,2821.09 1549,2866 1737,2866 1783,2912 ; 1555.28,2567.47 1643.21,2567.47 1673,2537.68 1673,2469.08 1673.08,2469 1677,2465.08 1677,2408 ; 1555.28,2587.16 1661.84,2587.16 1673,2598.31 1675,2598.31 ; 1555.28,2606.84 1509.84,2606.84 1485,2582 ; 1555.28,2626.53 1599.53,2626.53 1627,2654 v1(1627,2708) ; 1555.28,2705.27 1532,2728.54 1532,2817 1563,2848 1750,2848 1764,2862 1833,2862 1883,2912 ; v2(1566,2788) 1578,2776 1621,2776 1720,2677 1720,2590 1860,2450 1900,2450 1950.08,2399.92 ; 1673,2600.31 1675,2598.31 ; 1732.92,2469 1748.08,2453.84 1748.08,2399 1783.08,2364 1929.69,2364 1955,2338.69 ; 1796.6,2700.12 1796.6,2788.6 1836,2828 1952,2828 2139,2641 2139,2596 ; v2@1803,2290 1803,2248.92 1810.61,2241.31 1887,2241.31 ; 1810,2176 1844,2142 2047,2142 v1(2100,2195) ; 1834,2700.12 1834,2787 1856,2809 1936,2809 2039,2706 2039,2596 2019.69,2576.69 ; 1877,2408 1816.92,2408 1807.92,2399 1807.92,2465.39 1675,2598.31 ; 1957.39,2340.08 2028,2340.08 ; 1986,2917.31 2124.62,2917.31 ; 1996.09,2264.4 2139.71,2264.4 ; 2019,2339.08 2110.08,2339.08 2139,2368 ; 2064,2196.69 2132.62,2196.69 ; 2087.33,2917.31 ccw(c2087.33,2957.95) 2116.07,2929.22 ; v1(2100,2797) v1(2035,2797) 2056,2818 2056,2856.68 2124.62,2856.68 ; 2155.71,2697.63 2155.71,2849.6 ; 1167.68,2860.4 ccw(c1179.43,2879.57) 1184.68,2857.71 ; 1167.68,2860.4 ccw(c1179.43,2879.57) 1184.68,2857.71 ; 1167.68,2860.4 ccw(c1179.43,2879.57) 1184.68,2857.71 ; 1169.92,2851.04 cw(c1178.79,2845.6) 1176.37,2855.71 ; 1169.92,2851.04 cw(c1178.79,2845.6) 1176.37,2855.71 ; 1169.92,2851.04 cw(c1178.79,2845.6) 1176.37,2855.71 ; 1180.56,2854.6 cw(c1180.56,2871.04) 1168.93,2859.41 ccw(c1180.56,2871.04) 1180.56,2854.6 ; 1180.56,2854.6 ccw(c1180.56,2838.16) 1168.93,2849.78 cw(c1180.56,2838.16) 1180.56,2854.6 ; 1291.91,2854.6 cw(c1291.91,2917.8) 1244.89,2875.58 ccw(c1291.91,2917.8) 1291.91,2854.6 ; 1333.79,2637 cw(c1333.79,2600.79) 1359.39,2626.39 ccw(c1333.79,2600.79) 1333.79,2637 ; 1333.79,2637 ccw(c1333.79,2673.21) 1359.39,2647.61 cw(c1333.79,2673.21) 1333.79,2637 ; 1344.39,2546.39 cw(c1370,2520.79) 1370,2557 ccw(c1370,2520.79) 1344.39,2546.39 ; 1344.39,2546.39 ccw(c1318.79,2572) 1355,2572 cw(c1318.79,2572) 1344.39,2546.39 ; 1375,2507 cw(c1375,2517) 1367,2511 ccw(c1375,2517) 1375,2507 ; 1375,2507 1405.67,2476.33 ; 1405.67,2476.33 ccw(c1373.2,2443.86) 1359.48,2487.68 cw(c1373.2,2443.86) 1405.67,2476.33 ; 1455,2507 cw(c1455,2529.5) 1437,2516 ccw(c1455,2529.5) 1455,2507 ; 1455,2507 ccw(c1455,2484.5) 1437,2498 cw(c1455,2484.5) 1455,2507 ; 1485,2582 ccw(c1495.62,2582) 1493.29,2571.63 cw(c1495.62,2582) 1485,2582 ; 2019.11,2917.31 cw(c2019.11,2949.44) 1996.39,2926.72 ccw(c2019.11,2949.44) 2019.11,2917.31 ; 2019.11,2917.31 ccw(c2019.11,2885.19) 1996.39,2907.91 cw(c2019.11,2885.19) 2019.11,2917.31 ; 2089.11,2917.31 cw(c2089.11,2949.44) 2066.39,2926.72 ccw(c2089.11,2949.44) 2089.11,2917.31 ; 2089.11,2917.31 ccw(c2089.11,2885.19) 2066.39,2907.91 cw(c2089.11,2885.19) 2089.11,2917.31 ; 2112.44,2264.4 cw(c2112.44,2247.96) 2124.07,2259.59 ccw(c2112.44,2247.96) 2112.44,2264.4 ; 2112.44,2264.4 ccw(c2112.44,2280.84) 2124.07,2269.22 cw(c2112.44,2280.84) 2112.44,2264.4 ; 1046.13,2710.87 cw(c1085.07,2671.93) 1085.07,2727 ccw(c1085.07,2671.93) 1046.13,2710.87 ; 1053.2,2703.8 cw(c1109.21,2647.79) 1109.21,2727 ccw(c1109.21,2647.79) 1053.2,2703.8 ; 1060.27,2696.73 cw(c1133.36,2623.64) 1133.36,2727 ccw(c1133.36,2623.64) 1060.27,2696.73 ; 1067.34,2689.66 cw(c1157.5,2599.5) 1157.5,2727 ccw(c1157.5,2599.5) 1067.34,2689.66 ; 1168.93,2934.22 ccw(c1185.6,2950.88) 1185.6,2927.31 cw(c1185.6,2950.88) 1168.93,2934.22 ; 1171.71,2854.6 ccw(c1171.71,2927.99) 1223.61,2876.09 cw(c1171.71,2927.99) 1171.71,2854.6 ; 1195.85,2854.6 ccw(c1195.85,2903.85) 1230.68,2869.02 cw(c1195.85,2903.85) 1195.85,2854.6 ; 1237.44,2868.89 ccw(c1269.49,2897.67) 1269.49,2854.6 cw(c1269.49,2897.67) 1237.44,2868.89 ; 1241.71,2854.6 ccw(c1241.71,2927.99) 1293.61,2876.09 cw(c1241.71,2927.99) 1241.71,2854.6 ; 1265.85,2854.6 ccw(c1265.85,2903.85) 1300.68,2869.02 cw(c1265.85,2903.85) 1265.85,2854.6 ; v2@1353.51,2506.77 cw(c1362.06,2479.44) 1382.31,2499.69 ccw(c1362.06,2479.44) v2@1353.51,2506.77 ; v2@1356.49,2497.23 cw(c1367.63,2461.65) 1393.99,2488.01 ccw(c1367.63,2461.65) v2@1356.49,2497.23 ; 1398.53,2483.47 cw(c1382.54,2467.47) 1405.16,2467.47 ccw(c1382.54,2467.47) 1398.53,2483.47 ; 1420,2557 cw(c1420,2532.86) 1437.07,2549.93 ccw(c1420,2532.86) 1420,2557 ; v2@1425,2572 ccw(c1449.14,2572) 1432.07,2554.93 cw(c1449.14,2572) v2@1425,2572 ; 1435,2572 ccw(c1483.28,2572) 1449.14,2537.86 cw(c1483.28,2572) 1435,2572 ; 1476.38,2485.62 cw(c1458.23,2467.47) 1483.9,2467.47 ccw(c1458.23,2467.47) 1476.38,2485.62 ; v2@1479.39,2567.61 ccw(c1465.86,2581.14) 1485,2581.14 cw(c1465.86,2581.14) v2@1479.39,2567.61 ; 1992.32,2254.98 cw(c2015.08,2232.22) 2015.08,2264.4 ccw(c2015.08,2232.22) 1992.32,2254.98 ; 1999.39,2247.91 cw(c2039.22,2208.08) 2039.22,2264.4 ccw(c2039.22,2208.08) 1999.39,2247.91 ; 2013.78,2264.4 cw(c2013.78,2208.08) 2053.61,2247.91 ccw(c2013.78,2208.08) 2013.78,2264.4 ; 2074.39,2247.91 cw(c2114.22,2208.08) 2114.22,2264.4 ccw(c2114.22,2208.08) 2074.39,2247.91 ; 2146.24,2705.84 ccw(c2123.38,2728.7) 2155.71,2728.7 cw(c2123.38,2728.7) 2146.24,2705.84 ; 2146.24,2758.16 cw(c2123.38,2735.3) 2155.71,2735.3 ccw(c2123.38,2735.3) 2146.24,2758.16 ; 2146.24,2775.84 ccw(c2123.38,2798.7) 2155.71,2798.7 cw(c2123.38,2798.7) 2146.24,2775.84 ; 2155.71,2725.66 ccw(c2183.74,2725.66) 2163.92,2705.84 cw(c2183.74,2725.66) 2155.71,2725.66 ; 2155.71,2738.34 cw(c2183.74,2738.34) 2163.92,2758.16 ccw(c2183.74,2738.34) 2155.71,2738.34 ; 2155.71,2795.66 ccw(c2183.74,2795.66) 2163.92,2775.84 cw(c2183.74,2795.66) 2155.71,2795.66
  Top Layer w15: 1163.29,2199.6 1296.91,2199.6 1304,2206.68 ; 1208.05,2204.33 cw(c1214.08,2193.89) 1224.06,2200.64 ; 1283.05,2204.33 cw(c1289.08,2193.89) 1299.06,2200.64 ; v2(1420,2637) v2@1429.21,2646.21 ; 1796.6,2589.88 1796.6,2632.6 1801.92,2637.92 1939,2637.92 ; 1871.4,2589.88 1883.2,2578.08 1939,2578.08 ; 1189.82,2199.6 ccw(c1189.82,2249.88) 1225.37,2214.33 cw(c1189.82,2249.88) 1189.82,2199.6 ; 1242.63,2214.33 ccw(c1278.18,2249.88) 1278.18,2199.6 cw(c1278.18,2249.88) 1242.63,2214.33 ; 1264.82,2199.6 ccw(c1264.82,2249.88) 1300.37,2214.33 cw(c1264.82,2249.88) 1264.82,2199.6
  Top Layer w30: 1834,2589.88 1834,2534 1854,2514 2147,2514 2230,2597 2230,2681.92 2214.92,2697 2214.92,2767 ; 1950.08,2399.92 2028,2399.92 2089.08,2461 2117.69,2461 ; 2178.32,2461 2239,2400.32 2239,2368 ; 2215.65,2695.23 cw(c2181.02,2660.6) 2230,2660.6 ccw(c2181.02,2660.6) 2215.65,2695.23
  Bottom Layer w10: 1044.73,2505.54 ccw(c1085.6,2516.84) 1074.63,2475.87 ; 1048.3,2602.8 cw(c1023.39,2541.24) 1087.54,2558.43 ; 1048.93,2602.6 cw(c1041.61,2572.38) 1071.65,2580.43 ; 1050,2707 1150.08,2707 1155.08,2712 1155.08,2782 ; 1050.69,2512.43 cw(c1046.32,2477.93) 1079.9,2486.93 ; 1052.05,2612.07 cw(c1032.82,2564.54) 1082.35,2577.81 ; 1055,2507 1125,2437 v2(1235,2437) ; 1055,2607 1055,2587 1110,2532 v2(1165,2532) ; 1060,2407 1200,2267 ; 1200,2207 1310,2317 v1(1310,2567) ; 1214.92,2912 1214.92,2782 1214.92,2712 1295,2712 ; 1224,2207 1224,2267 ; v2@1351.61,2498.32 ccw(c1376.94,2525.84) 1378.49,2488.48 ; v2(1355,2502) 1360,2507 1375,2507 1405.67,2476.33 ; 1366.04,2491.84 cw(c1380.55,2478.49) 1379.73,2498.19 ; v2(1385,2887) 1390,2892 1455,2892 1595,3032 ; 1415,2187 1460,2232 1460,2327 1405.67,2381.33 1405.67,2476.33 ; v2(1425,2507) 1395,2537 1340,2537 v1(1310,2567) ; v2(1425,2927) 1444,2946 1444,3049 1472,3077 1650,3077 1695,3032 ; v2(1430,2857) 1495,2857 1576,2776 ; v2(1480,2682) 1480,2677 1500,2697 1620,2697 v1@1630.55,2707.55 ; v2@1487.5,2552.67 cw(c1456.73,2499.38) 1516.17,2515.3 ; v2@1488.02,2552.41 cw(c1479.8,2533.28) 1499.91,2538.67 ; v2(1490,2557) v2@1485,2557 ; v2@1492.5,2561.33 cw(c1473.8,2528.94) 1509.92,2538.62 ; 1501.02,2534.53 cw(c1520.07,2539.64) 1502.99,2549.5 ; 1683,2912 1630.55,2859.55 v1@1630.55,2707.55 ; 1715,2282 1776,2221 2111,2221 ; 1717,2729.08 1652.08,2729.08 v1@1630.55,2707.55 ; 1784,2645.92 1715,2645.92 1653.37,2707.55 v1@1630.55,2707.55 ; v2(1804,2290) 1804,2305 1752,2357 1670,2357 1485,2542 v2@1485,2557 ; v1(2062,2983) 2071,2974 2071,2897 ; v1@2095,2802 2095,2897 ; v1(2100,2195) 2139,2234 2139,2368 2039,2468 2039,2596 2039,2666 2100,2727 ; 1085.07,2707 cw(c1085.07,2742.07) 1060.27,2717.27 ccw(c1085.07,2742.07) 1085.07,2707 ; 1085.07,2707 ccw(c1085.07,2671.93) 1060.27,2696.73 cw(c1085.07,2671.93) 1085.07,2707 ; 1109.21,2707 cw(c1109.21,2766.21) 1067.34,2724.34 ccw(c1109.21,2766.21) 1109.21,2707 ; 1109.21,2707 ccw(c1109.21,2647.79) 1067.34,2689.66 cw(c1109.21,2647.79) 1109.21,2707 ; 1134.47,2707 cw(c1134.47,2693.89) 1143.74,2703.16 ccw(c1134.47,2693.89) 1134.47,2707 ; 1134.47,2707 ccw(c1134.47,2730.11) 1150.81,2713.77 cw(c1134.47,2730.11) 1134.47,2707 ; 1155.08,2742.18 cw(c1124.9,2742.18) 1146.24,2720.84 ccw(c1124.9,2742.18) 1155.08,2742.18 ; 1155.08,2742.18 ccw(c1185.26,2742.18) 1163.92,2720.84 cw(c1185.26,2742.18) 1155.08,2742.18 ; 1155.08,2751.82 cw(c1185.26,2751.82) 1163.92,2773.16 ccw(c1185.26,2751.82) 1155.08,2751.82 ; 1155.08,2751.82 ccw(c1124.9,2751.82) 1146.24,2773.16 cw(c1124.9,2751.82) 1155.08,2751.82 ; 1295,2712 cw(c1270.85,2687.84) 1305,2687.26 ccw(c1270.85,2687.84) 1295,2712 ; 1295,2712 ccw(c1319.16,2736.15) 1319.74,2702 cw(c1319.16,2736.15) 1295,2712 ; 1295,2712 v2(1320,2687) 1320,2577 v1(1310,2567) ; 1405.67,2476.33 ccw(c1373.2,2443.86) 1359.48,2487.68 cw(c1373.2,2443.86) 1405.67,2476.33 ; v2@1485,2557 ccw(c1521.21,2557) 1495.61,2531.39 cw(c1521.21,2557) v2@1485,2557 ; 2102.43,2769.25 cw(c2115.85,2772.85) v1@2108.23,2784.46 ; 2102.43,2769.25 cw(c2115.85,2772.85) v1@2108.23,2784.46 ; 2102.43,2769.25 cw(c2115.85,2772.85) v1@2108.23,2784.46 ; 1050,2482.47 cw(c1050,2411.19) 1100.41,2461.59 ccw(c1050,2411.19) 1050,2482.47 ; 1050,2492.47 cw(c1050,2445.33) 1083.34,2478.66 ccw(c1050,2445.33) 1050,2492.47 ; 1050,2582.47 cw(c1050,2559.47) 1066.26,2575.74 ccw(c1050,2559.47) 1050,2582.47 ; 1054.53,2607 ccw(c1101.67,2607) 1068.34,2573.66 cw(c1101.67,2607) 1054.53,2607 ; 1064.53,2607 ccw(c1135.81,2607) 1085.41,2556.59 cw(c1135.81,2607) 1064.53,2607 ; 1074.53,2507 ccw(c1121.67,2507) 1088.34,2473.66 cw(c1121.67,2507) 1074.53,2507 ; 1074.53,2607 ccw(c1169.96,2607) 1102.48,2539.52 cw(c1169.96,2607) 1074.53,2607 ; 1110.33,2707 ccw(c1110.33,2754.25) 1143.74,2720.84 cw(c1110.33,2754.25) 1110.33,2707 ; v2@1353.51,2506.77 cw(c1362.06,2479.44) 1382.31,2499.69 ccw(c1362.06,2479.44) v2@1353.51,2506.77 ; v2@1356.49,2497.23 cw(c1367.63,2461.65) 1393.99,2488.01 ccw(c1367.63,2461.65) v2@1356.49,2497.23 ; v2@1495,2557 ccw(c1555.36,2557) 1512.68,2514.32 cw(c1555.36,2557) v2@1495,2557 ; 1505,2557 ccw(c1589.5,2557) 1529.75,2497.25 cw(c1589.5,2557) 1505,2557 ; 2082.32,2744.68 ccw(c2051.71,2775.28) 2095,2775.28 cw(c2051.71,2775.28) 2082.32,2744.68 ; 2095,2748.71 cw(c2148.29,2748.71) 2110.61,2786.39 ccw(c2148.29,2748.71) 2095,2748.71 ; 2095,2773.66 ccw(c2144.44,2773.66) 2110.34,2737.86 cw(c2144.44,2773.66) 2095,2773.66 ; v1@2095,2797 ccw(c2166.66,2797) 2117.24,2745.1 cw(c2166.66,2797) v1@2095,2797
  Bottom Layer w20: 1388.13,2598.03 ccw(c1415.27,2612.47) v2@1418.84,2581.93 ; v2(1420,2572) 1665,2327 1665,2237 1715,2187 v2@1880.68,2187 ; 1583,2912 1639,2968 1819,2968 1833,2954 1833,2809 ; 1683.79,2617 1713.71,2587.08 1785,2587.08 ; 1717,2788.92 1812.92,2788.92 1833,2809 ; v1(1893,2749) 1833,2809
  Bottom Layer w30: 1395,3032 1347,2984 1347,2800 1420,2727 v2(1420,2637)
  Bottom Layer w40: 1395.83,2607 1624.17,2607 ; 1629.17,2526.45 1838.45,2526.45 1893,2581 v1(1893,2696) v1(1893,2749) ; v2(1420,2572) cw(c1473.04,2557.79) 1445.58,2605.34 ccw(c1473.04,2557.79) v2(1420,2572)
  Bottom Layer w70: 1065,2207 1165,2107 1165,2094 2152,2094 2235,2177 2235,2727 2235,2922 2130,3027 2033,3124 1257,3124 1160,3027 1070,2937 1070,2912 ; 1065,2912 cw(c1113.29,2912) 1079.14,2946.14 ccw(c1113.29,2912) 1065,2912 ; 2217.32,2939.68 cw(c2174.64,2897) 2235,2897 ccw(c2174.64,2897) 2217.32,2939.68
  other v1: 1234,2927 1136,3116 1061,3118 2159,3122 2243,3122
  other v2: 1887,2180.68 1388,2953

## Polygon pours and split planes (outlines as drawn)
GND on Top Layer "Top Layer-No Net" (solid, remove dead copper, pour order 7): 1000,5000 4935,5000 4935,3250 1000,3250
no net on Top Layer "Top Layer-No Net" (solid, remove dead copper, pour order 5): 1005,3170 2295,3170 2295,2037 1005,2037
GND on Bottom Layer "Top Layer-No Net" (solid, remove dead copper, pour order 8): 1000,5000 4935,5000 4935,3250 1000,3250
no net on Bottom Layer "Top Layer-No Net" (solid, remove dead copper, pour order 6): 1005,3170 2295,3170 2295,2037 1005,2037

## Keep-outs
Keep-Out Layer:
  lines w10: 1300,5000.04 ccw(c1300,4700) 999.96,4700 999.96,3550.04 1000,3550 ccw(c1300.04,3550) 1300.04,3249.96 4635,3249.96 ; 1300.04,5000 4635,5000 cw(c4635,4699.96) 4935.04,4699.96 ; 4635.04,3250 ccw(c4635.04,3550.04) 4935.08,3550.04 4935.08,4699.92 ; 1005,2037 2295,2037 2295,3170 1005,3170 1005,2037

## Other copper
Top Layer:
  rectangle: 2205,2053 2284,2239
  rectangle: 2194,2867 2279,3077
  rectangle: 1025,2877 1090,3057
  rectangle: 1355,2552 1450,2682
  rectangle: 1858,2669 1926,2776
  rectangle: 1025,2057 1100,2252

## Silkscreen, mask and mechanical layers (free items; w line width, h text height)
Top Overlay:
  text "UAV_SZ" at 3346.62,3325 h100
  text "UAV_SZ" at 1815,2072 h60
Top Paste:
  rectangle: 2205,2053 2287,2239
  rectangle: 2194,2867 2279,3077
  rectangle: 1025,2877 1090,3057
  rectangle: 1355,2552 1449,2682
  rectangle: 1025,2057 1100,2252
Bottom Paste:
  lines w70: 1066,2205 1165,2106 ; 1069,2914 1069,2936 1257,3124 2033,3124 2235,2922 2235,2177 2150,2092 1165,2092
Top Solder:
  rectangle: 2205,2053 2287,2239
  rectangle: 2194,2867 2279,3077
  rectangle: 1025,2877 1090,3057
  rectangle: 1356,2551 1450,2681
  rectangle: 1025,2057 1100,2252
Bottom Solder:
  lines w70: 1066,2206 1165,2107 1165,2092 ; 1070,2937 1160,3027 1161,3027 1258,3124 2033,3124 2236,2921 2236,2178 2150,2092 1180,2092